# Altium PCB TLV3501窗口比较器.PcbDoc
Units mil, origin at the board's own origin, x right, y up, seen from the top; angles counter-clockwise.
Board outline 1470 x 1485 mil, 2 copper layers (Top Layer, Bottom Layer); 24 components, 15 nets, 74 pads, 41 vias.
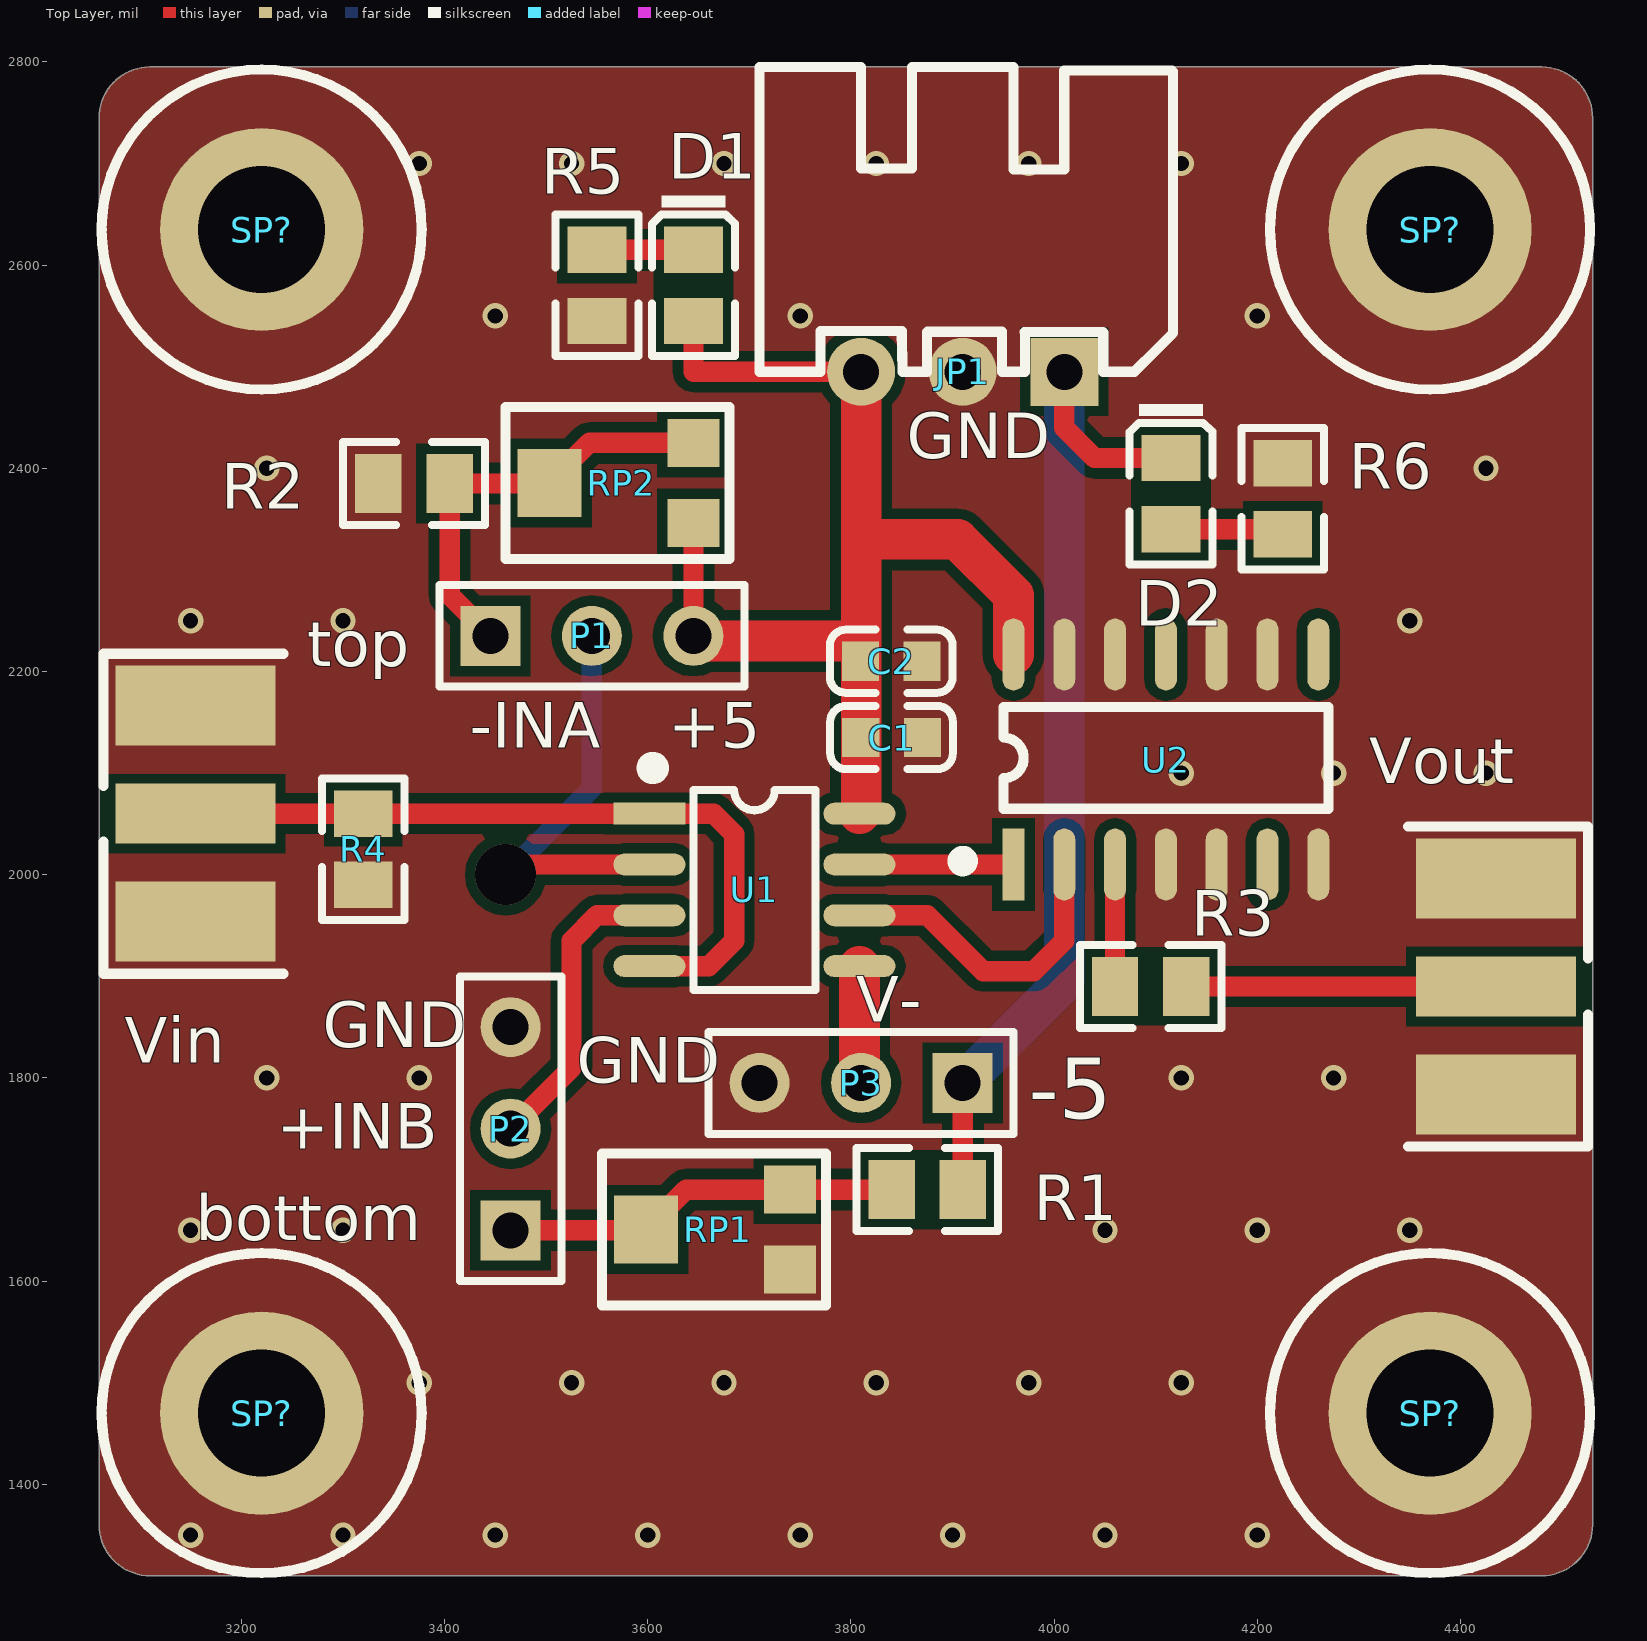
[diagram p0: Top Layer view]
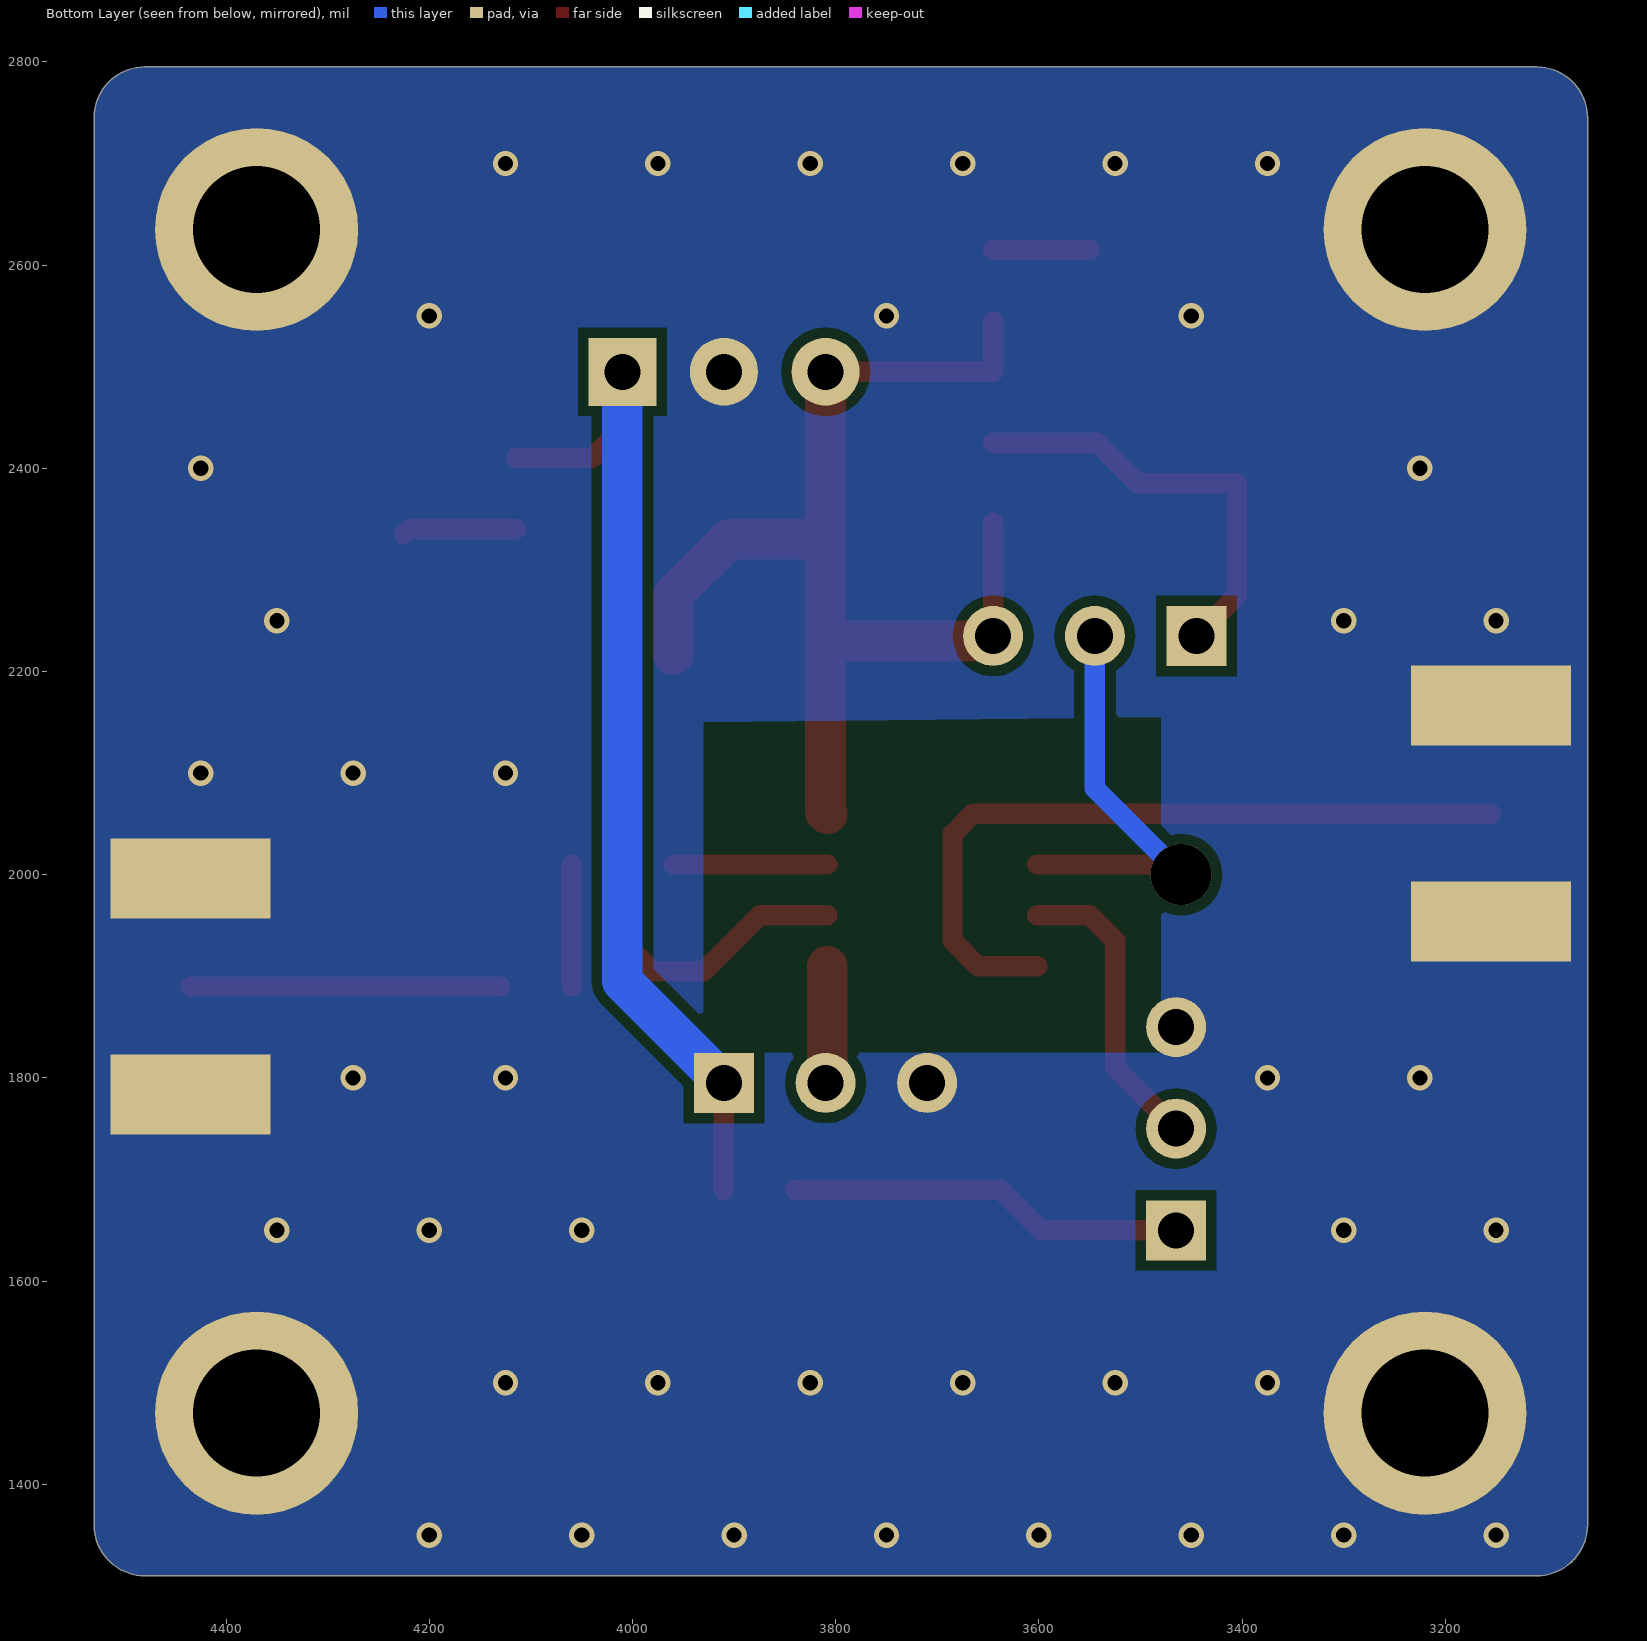
[diagram p1: Bottom Layer view, seen from below]
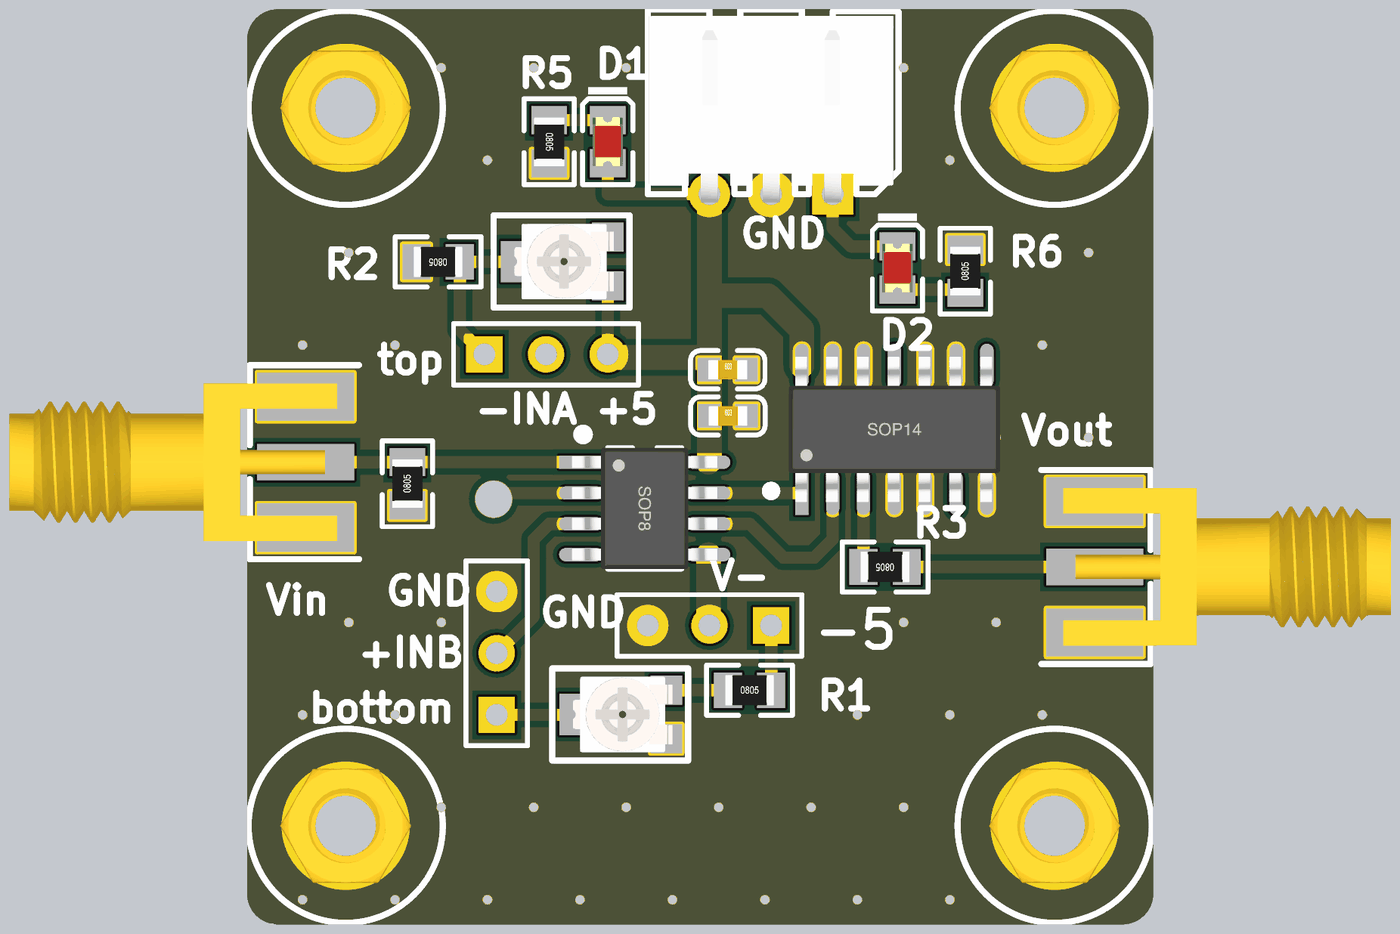
[diagram p2: 3D render of the assembled board from above, using the file's embedded part models]

## Layer stack, top to bottom
Top Solder: solder mask 0.4, Solder Resist, Dk 3.5
Top Layer: signal copper 1.4
Dielectric 1: dielectric 12.6, FR-4, Dk 4.8
Bottom Layer: signal copper 1.4
Bottom Solder: solder mask 0.4, Solder Resist, Dk 3.5

## Board outline
3060,1360 3060,2745 cw(c3110,2745) 3110,2795 4480,2795 cw(c4480,2745) 4530,2745 4530,1540 4530,1360 cw(c4480,1360) 4480,1310 3110,1310 cw(c3110,1360)

## Design rules (kind name [scope] priority, off if disabled: settings)
Clearance [All] p1: gap=10 ignorepadtopadclearanceinfootprint=FALSE except(0: Arc-Hole Track-Hole SMDPad-Hole THPad-Hole Via-Hole Fill-Hole Poly-Hole Region-Hole Text-Hole)
PolygonConnect [All] p1: connectstyle=Direct reliefconductorwidth=10 reliefentries=4 polygonreliefangle="90 Angle" airgapwidth=10
RoutingVias [All] p1: holewidth=28 width=50 viastyle="Through Hole" minholewidth=28 minwidth=50 maxholewidth=28 maxwidth=50
SolderMaskExpansion [All] p1: expansion=4
Width [All] p1: maxlimit=59 minlimit=10 preferedwidth=10 toplayer_maxwidth=50 minimp=50.000000 maximp=50.000000 favimp=50.000000
30 further rules are at their usual default settings.

## Classes and differential pairs
component class Sheet1: C1 C2 D1 D2 JP1 P1 P3 R1 R2 R3 R4 R5 R6 RP1 RP2 SP? U1 U2 Vin Vout ""

## Components (designator, comment, footprint, x,y, rotation, side; value= is the part's Value field where it differs from the comment)
C1 "C2 100n" 0603_C 3840,2135 r0 top
C2 "CAP" 0603_C 3839.68,2210 r0 top
D1 "翠绿 0805" 0805_LED_S1 3645,2580.04 r270 top
D2 "翠绿 0805" 0805_LED_S1 4115,2375.04 r270 top
JP1 "HDR-1X3" XH2.54-WI-3P 3910,2495 r180 top
P1 "Header 3" HDR1X3 3445,2235 r0 top
P2 "Header 3" HDR1X3 3465,1650 r90 top
P3 "Header 3" HDR1X3 3910,1795 r180 top
R1 "RES" 0805_R 3875.04,1690 r0 top
R2 "RES" 0805_R 3369.96,2385 r180 top
R3 "RES" 0805_R 4094.96,1890 r180 top
R4 "RES" 0805_R 3320,2025.04 r90 top
R5 "RES" 0805_R 3550,2579.96 r270 top
R6 "RES" 0805_R 4225,2369.96 r90 top
RP1 "10K" 3303W 3669.13,1650.63 r90 top
RP2 "10K" 3303W 3574.13,2385.63 r90 top
SP? "M3铜柱" M3x4_L 3220,2635 r0 top
SP? "M3铜柱" M3x4_L 3220,1470 r0 top
SP? "M3铜柱" M3x4_L 4370,2635 r0 top
SP? "M3铜柱" M3x4_L 4370,1470 r0 top
U1 "TLV3502" SOP8_N 3705,1985 r0 top
U2 "CD74HC08" SOP14_N 4110,2113.35 r90 top
Vin "COAX-M" sma-KE 3155,2060 r90 top (schematic designator Vin1)
Vout "COAX-M" SMA-KE 4435,1890 r270 top (schematic designator Vout1)

## Footprints (in the part's own frame and the unit in brackets; to place one, negate y for a bottom-side part, rotate by r counter-clockwise, add the part's x,y. Pads: shape width x height; smd on the part's side, far side on the other; paste and mask are expansions set on the pad)
0603_C [mm]
  rect 0.93x0.98 smd: 1(-0.77,0) 2(0.77,0)
  silkscreen extent -1.53,-0.79 1.54,0.79, body extent -0.8,-0.4 0.8,0.4, height 0.3
0805_LED_S1 [mm]
  rect 1.16x1.47 smd: A(0.89,0) K(-0.89,0)
  silkscreen extent -2.25,-1.04 1.77,1.03, body extent -1.01,-0.62 1.01,0.62, height 1.1
0805_R [mm]
  rect 1.16x1.47 smd: 1(-0.89,0) 2(0.89,0)
  silkscreen extent -1.77,-1.04 1.77,1.03, body extent -1,-0.62 1,0.63, height 0.49
3303W [mm] "3.5*3.1*1.5mm"
  rect 1.2x1.3 smd: 1(-1,-1.8) 3(1,-1.8)
  rect 1.7x1.6 smd: 2(0,1.8)
  silkscreen extent -1.9,-2.7 1.9,2.9, body extent -1.55,-2.06 1.55,2.05, height 1.45
HDR1X3 [mm] "Connector; Header; 3 Position"
  rect 1.5x1.5 hole 0.9: 1(0,0)
  round 1.5 hole 0.9: 2(2.54,0) 3(5.08,0)
  silkscreen extent -1.27,-1.27 6.35,1.27
M3x4_L [mil] "M3铜柱，长：4mm"
  round 200 hole 125: 1(0,0)
  silkscreen extent -157,-157 157,157, body extent -106,-93 106,93, height 159
sma-KE [mm] "SMA 偏脚射频天线座     淘宝ID:黄晶宝石"
  rect 1.5x4 smd: 1(0,0)
  rect 2x4 smd: 2(-2.7,0) 2(2.7,0)
  rect 2x4 smd far side: 3(-2.7,0) 3(2.7,0)
  silkscreen extent -4,-2.2 4,2.3, body extent -3.25,-1.3 3.25,12.2, height 3.75
SMA-KE [mm] "SMA 偏脚射频天线座     淘宝ID:黄晶宝石"
  rect 1.5x4 smd: 1(0,0)
  rect 2x4 smd: 2(-2.7,0) 2(2.7,0)
  rect 2x4 smd far side: 3(-2.7,0) 3(2.7,0)
  silkscreen extent -4,-2.2 4,2.3, body extent -3.25,-1.3 3.25,12.2, height 3.75
SOP8_N [mm] "5*6*1.8mm（长宽高）"
  rect 1.8x0.55 smd: 1(-2.625,1.905)
  oval 1.8x0.55 smd: 2(-2.625,0.635) 3(-2.625,-0.635) 4(-2.625,-1.905) 5(2.625,-1.905) 6(2.625,-0.635) 7(2.625,0.635) 8(2.625,1.905)
  silkscreen extent -2.69,-2.5 1.52,3.2, body extent -3,-2.5 3,2.5, height 1.9
SOP14_N [mm] "8.7*6.2*1.8mm（长宽高）"
  rect 1.8x0.55 smd: 1(-2.625,3.81)
  oval 1.8x0.55 smd: 2(-2.625,2.54) 3(-2.625,1.27) 4(-2.625,0) 5(-2.625,-1.27) 6(-2.625,-2.54) 7(-2.625,-3.81) 8(2.625,-3.81) 9(2.625,-2.54) 10(2.625,-1.27) 11(2.625,0) 12(2.625,1.27) 13(2.625,2.54) 14(2.625,3.81)
  silkscreen extent -2.67,-4.06 1.31,5.21, body extent -3,-4.35 3,4.35, height 1.9
XH2.54-WI-3P [mm] "接插件，3P"
  rect 1.7x1.7 hole 0.9: 1(-2.54,0)
  round 1.7 hole 0.9: 2(0,0) 3(2.54,0)
  silkscreen extent -5.26,-7.62 5.08,0, body extent -5.04,-7.35 5.04,0.35, height 5.73

## Part data
C1: library part CAP1
D1 D2: library part "0805 翠绿", "发光二极管", Package=0805, SuppliersPartNumber=C2297, ComponentLink1Description=供应商链接, ComponentLink1URL=http://www.szlcsc.com/product/details_2670.html, Supplier=LC
JP1: library part "Header 3", "3P接插件", BOM名称=3P接插件
P1 P2 P3: "Header, 3-Pin", LatestRevisionDate=17-Jul-2002, LatestRevisionNote="Re-released for DXP Platform.", Publisher="Altium Limited"
RP1 RP2: library part RP-SMD, "贴片电位器"
SP? SP? SP? SP?: library part 铜柱小焊盘, "铜柱"
Vin Vout: "RF Coaxial PCB Connector, MMCX; Thru-Hole, Vertical Mount Plug,  50 Ohm Impedance", PackageDocument="Rev. A, 16-Jun-1997", ComponentLink1Description="Manufacturer Link", ComponentLink1URL=http://www.amphenolrf.com/, DatasheetDocument=30-May-2003, DrillSize="Corresponds to nominal value.", LatestRevisionDate=15-Jul-2004, LatestRevisionNote="Component Replaced.", PackageReference=908-21103, PCB_Layout="Complies with manufacturer's recommendation.", Published=15-Jul-2004, Publisher="Altium Limited"

## Via types
v1: diameter 25, hole 15, Top Layer to Bottom Layer, tented both sides, 40 vias
v2: diameter 60, hole 60, Top Layer to Bottom Layer, tented both sides, 1 vias

## Nets (pads, with @x,y where several pads share a name; then routed paths per layer and width w, separated by ;. In a path a pad name is that pad's centre, name@x,y a point inside that pad or via, vN(x,y) a via of type N, cw(c..) or ccw(c..) an arc to the next point about the centre after c; other vN are vias at no path point)
bottom: P2.1 R1.1 RP1.2 RP1.3 | length 391.6
  Top Layer w20: P2.1 3597.64,1650 RP1.2 3637.64,1690 RP1.3 R1.1
GND: C1.2 C2.2 JP1.2 P2.3 P3.3 R2.2 R4.1 R5.2 R6.2 RP1.1 SP?.1 U2.4 U2.5 U2.7 U2.9 U2.10 U2.12 U2.13 Vin.2 Vin.3 Vout.2 Vout.3
  other v1: 3150,1350 3300,1350 3450,1350 3600,1350 3750,1350 3900,1350 4050,1350 4200,1350 3375,1500 3525,1500 3675,1500 3825,1500 3975,1500 4125,1500 3150,1650 3300,1650 4050,1650 4200,1650 4350,1650 3225,1800 3375,1800 4125,1800 4275,1800 4125,2100 4275,2100 4425,2100 3150,2250 3300,2250 4350,2250 3225,2400 4425,2400 3450,2550 3750,2550 4200,2550 3375,2700 3525,2700 3675,2700 3825,2700 3975,2700 4125,2700
IN: R4.2 U1.1 U1.4 Vin.1 | length 737.1
  Top Layer w20: Vin.1 3319.92,2060 R4.2 3601.57,2060.08 U1.1 3665,2060 3685,2040 3685,1935 3660,1910 U1.4
NetD1_K: D1.K R5.1 | length 95
  Top Layer w20: R5.1 3644.92,2615 D1.K
NetD2_A: D2.A R6.1 | length 112.1
  Top Layer w20: D2.A 4219.92,2340 R6.1
NetR3_2: R3.2 U2.3 | length 120
  Top Layer w20: R3.2 4059.92,2009.92 U2.3
NetU1_6: U1.6 U2.2 | length 311.9
  Top Layer w20: U1.6 3875,1960 3930,1905 3980,1905 4010,1935 U2.2
NetU1_7: U1.7 U2.1 | length 151.7
  Top Layer w20: U1.7 U2.1
OUT: R3.1 Vout.1 | length 305
  Top Layer w20: R3.1 Vout.1
top: P1.1 R2.1 RP2.2 RP2.3 | length 423.1
  Top Layer w20: P1.1 3405,2275 R2.1 3502.64,2385 RP2.2 3542.64,2425 RP2.3
V-: P3.2 U1.5 | length 115.7
  Top Layer w40: U1.5 3808.35,1796.65 P3.2
VCC: C1.1 C2.1 D1.A JP1.3 P1.3 RP2.1 U1.8 U2.14 | length 1160.1
  Top Layer w20: P1.3 RP2.1 ; D1.A 3645,2495 JP1.3
  Top Layer w40: P1.3 3650,2230 3810,2230 ; U1.8 3810,2061.65 3810,2230 ; JP1.3 3810,2330 ; U2.14 3960,2275 3905,2330 3810,2330 ; 3810,2230 3810,2330
VEE: D2.K JP1.1 P3.1 R1.2 | length 1018.8
  Top Layer w20: P3.1 3910.08,1794.92 R1.2 ; JP1.1 4010,2440 4039.92,2410.08 D2.K
  Bottom Layer w40: P3.1 4010,1895 JP1.1
VTH: P2.2 U1.3 | length 296.9
  Top Layer w20: P2.2 3525,1810 3525,1935 3550,1960 U1.3
VTL: P1.2 U1.2 | length 416
  Top Layer w20: v2(3460,2000) 3470,2010 U1.2
  Bottom Layer w20: v2(3460,2000) 3545,2085 P1.2
pads on no net: U2.6 U2.8 U2.11

## Polygon pours and split planes (outlines as drawn)
GND on Bottom Layer "Top Layer-No Net1" (solid, pour order 5): 3060,1360 3060,2745 cw(c3110,2745) 3110,2795 4480,2795 cw(c4480,2745) 4530,2745 4530,1540 4530,1360 cw(c4480,1360) 4480,1310 3110,1310 cw(c3110,1360)
GND on Top Layer "Top Layer-No Net" (solid, pour order 6): 3060,1360 3060,2745 cw(c3110,2745) 3110,2795 4480,2795 cw(c4480,2745) 4530,2745 4530,1540 4530,1360 cw(c4480,1360) 4480,1310 3110,1310 cw(c3110,1360)

## Other copper
Top Layer:
  pour cut-out: 3055,2090 3095,2090 3095,2030 3100,2025 3050,2025
  pour cut-out: 3080,2090 3055,2090 3055,2035 3075,2035 3080,2030 3055,2030
  pour cut-out: 4490,1920 4535,1920 4535,1855 4490,1855
Bottom Layer:
  pour cut-out: 3480,2155 3480,1825 3920,1825 3930,1835 3930,2150

## Silkscreen, mask and mechanical layers (free items; w line width, h text height)
Top Overlay:
  text "GND" at 3855,2410 h45
  text "top" at 3265,2205 h45
  text "-INA" at 3425,2125 h45
  text "+5" at 3620,2125 h45
  text "V-" at 3805,1855 h45
  text "GND" at 3280,1830 h45
  text "GND" at 3530,1795 h45
  text "-5" at 3975,1760 h60
  text "+INB" at 3235,1730 h45
  text "bottom" at 3155,1640 h45
Mechanical 1:
  lines w10: 3060,1360 ccw(c3110,1360) 3110,1310 3165,1310 4480,1310 ccw(c4480,1360) 4530,1360 4530,1540 4530,2745 ccw(c4480,2745) 4480,2795 3700,2795 3110,2795 ccw(c3110,2745) 3060,2745 3060,1500 3060,1360